# Allegro board BU90007GWZ-E2EVK-101_BRD_REV00_2014-02-12.brd
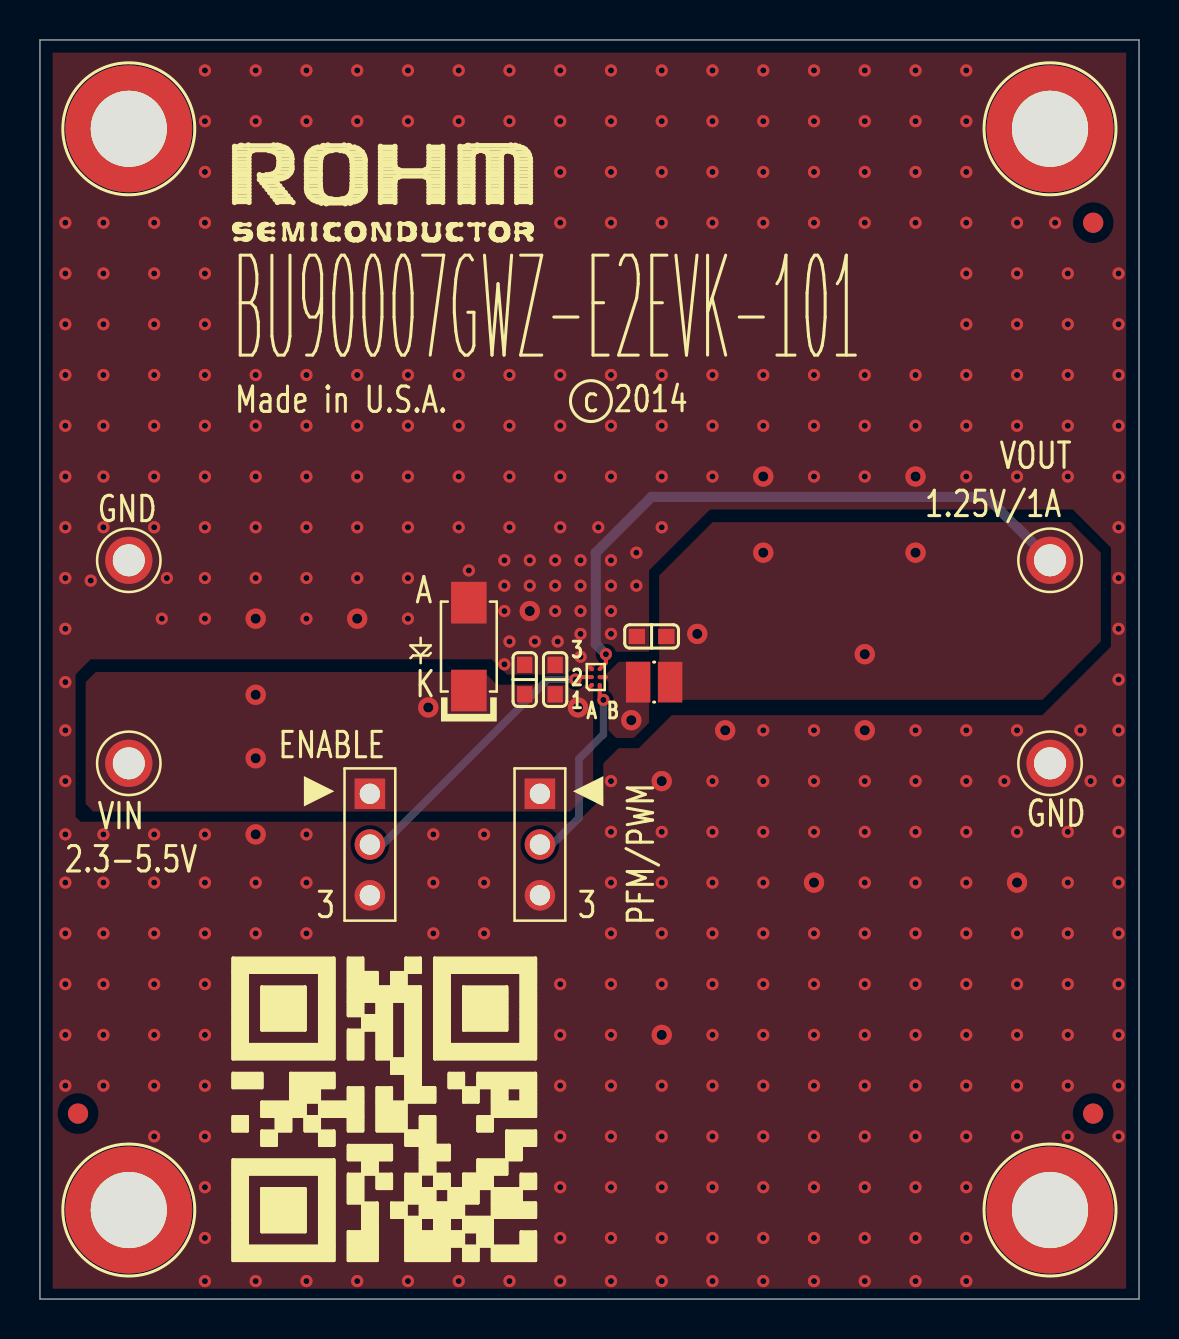
[diagram p0: board, top side]
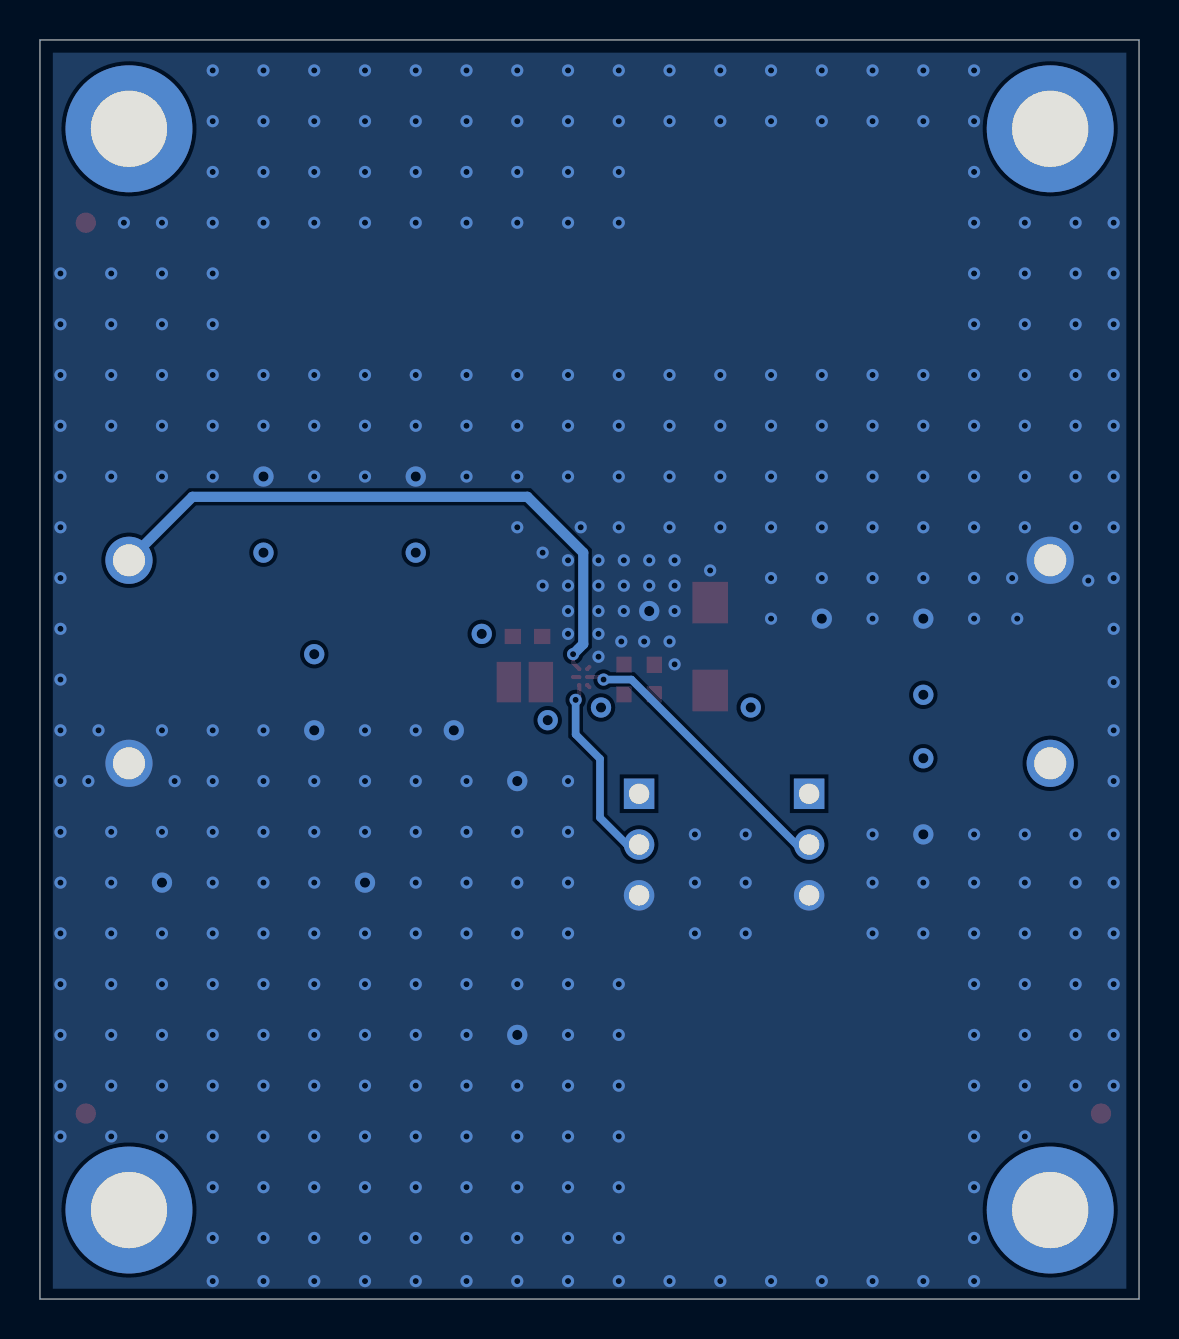
[diagram p1: board, bottom side, seen from below]

Outline 55 x 63 mm; copper layers: TOP, BOTTOM. Coordinates in mm from the lower left corner of the outline.
Outline path: 0,63 55,63 55,0 0,0 0,63

## Placement (name value [footprint] x y rotation side)
C1  4.7uF  [C0603]  24.26 31 270 top
C2  4.7uF  [C0603]  30.61 33.15 0 top
C3  0.1uF  [C0603]  25.78 31 270 top
D1  P4SMA6.8A  [DO-214AC]  21.46 32.65 90 top
J1  87224-3  [HDR_THVT_1X3_100]  16.51 25.28 270 top
J2  87224-3  [HDR_THVT_1X3_100]  25.02 25.28 270 top
L1  1.0uH  [SMT_2P5X2P0_FIT]  30.73 30.87 0 top
NOREF  -  []  0 63 0 top
NOREF#2  -  [unnamed#2]  50.55 58.55 0 top
NOREF#3  -  []  4.45 4.45 0 top
NOREF#4  -  [unnamed#3]  52.7 53.86 0 top
NOREF#5  -  [unnamed#3]  1.91 9.28 0 top
NOREF#6  -  []  55 0 0 top
NOREF#7  -  [unnamed#2]  4.45 4.45 0 top
NOREF#8  -  []  50.55 4.45 0 top
NOREF#9  -  []  0 63 0 top
NOREF#10  -  [unnamed#2]  4.45 58.55 0 top
NOREF#11  -  []  0 0 0 top
NOREF#12  -  []  -63.5 -109.34 0 top
NOREF#13  -  []  4.45 4.45 0 top
NOREF#14  -  []  4.45 58.55 0 top
NOREF#15  -  []  0 0 0 top
NOREF#16  -  []  -18.29 -22.09 0 top
NOREF#17  -  [unnamed#2]  50.55 4.45 0 top
NOREF#18  -  [unnamed#3]  52.7 9.28 0 top
NOREF#19  -  []  55 0 90 top
TP1  TP_TH_63MIL_RED  [TP_TH]  4.45 26.8 0 top
TP2  TP_TH_63MIL_BLK  [TP_TH]  4.45 36.96 0 top
TP3  TP_TH_63MIL_RED  [TP_TH]  50.55 36.96 0 top
TP4  TP_TH_63MIL_BLK  [TP_TH]  50.55 26.8 0 top
U1  BU90007GWZ  [UCSP35L1]  27.81 31.12 90 top

## Library data of the parts
C1-C3 = CAP_VER
D1 = DIODE_ZENER_VER
J1 J2 = CONN_PCB_3x1_2.100INCH
L1 = IND_HOZ
TP1 TP3 = TP_TH_63MIL_RED
TP2 TP4 = TP_TH_63MIL_BLK
U1 = IC_BU9000xGWZ

## Footprints (pads in the part's own frame, mm; a bottom-side part is the same pattern mirrored in y, then rotated)
C0603
  rect 0.813x0.762 smd: 1(0.737,0) 2(-0.737,0)
DO-214AC
  rect 2.083x1.778 smd: 1(-2.2,0) 2(2.2,0)
HDR_THVT_1X3_100
  rect 1.524x1.524 hole 1.016: 1(0,0)
  round 1.524 hole 1.016: 2(2.54,0) 3(5.08,0)
SMT_2P5X2P0_FIT
  rect 1.219x2.032 smd: 1(-0.8,0) 2(0.8,0)
TP_TH
  round 2.362 hole 1.6: 1(0,0)
UCSP35L1
  round 0.203 smd: A1(-0.4,0.2) A2(0,0.2) A3(0.4,0.2) B1(-0.4,-0.2) B2(0,-0.2) B3(0.4,-0.2)
unnamed#2
  round 6.35 hole 3.81: (0,0)
unnamed#3
  round 1.016 smd: 1(0,0)

## Nets
GND: C1.2 C2.2 C3.2 D1.2(A) J1.3 J2.3 TP2.1 TP4.1 U1.A3(GND)
VIN: C1.1 C3.1 D1.1(C) J1.1 J2.1 TP1.1 U1.A1(VIN)
VOUT: C2.1 L1.2 TP3.1 U1.B3(FB)
N10639: J1.2 U1.A2(EN)
N10643: J2.2 U1.B1(MODE)
N10688: L1.1 U1.B2(LX)

Pads without a net: NOREF#4 1; NOREF#5 1; NOREF#18 1

## Via types
v1: diameter 0.61, hole 0.305, TOP to BOTTOM, 365 vias
v2: diameter 1.016, hole 0.508, TOP to BOTTOM, 21 vias

## Routing (per net, layer and track width the routed paths; a pad name or vN(x,y) marks a point on that pad's centre or on a via; arc(x,y) is an arc through that point)
GND: length 0.2
  TOP w0.203: U1.A3 27.51,31.63
  vias: v1(1.27,53.86) v1(1.27,51.32) v1(1.27,48.78) v1(1.27,46.24) v1(1.27,43.7) v1(1.27,41.16) v1(1.27,38.62) v1(1.27,36.08) v1(1.27,33.54) v1(1.27,30.87) v1(1.27,28.46) v1(1.27,25.92) v1(1.27,23.25) v1(1.27,20.84) v1(1.27,18.3) v1(1.27,15.76) v1(1.27,13.22) v1(1.27,10.68) v1(2.54,35.95) v1(3.18,53.86) v1(3.18,51.32) v1(3.18,48.78) v1(3.18,46.24) v1(3.18,43.7) v1(3.18,41.16) v1(3.18,38.62) v1(3.18,23.25) v1(3.18,20.84) v1(3.18,18.3) v1(3.18,15.76) v1(3.18,13.22) v1(3.18,10.68) v1(5.71,53.86) v1(5.71,51.32) v1(5.71,48.78) v1(5.71,46.24) v1(5.71,43.7) v1(5.71,41.16) v1(5.71,38.62) v1(5.71,23.25) v1(5.71,20.84) v1(5.71,18.3) v1(5.71,15.76) v1(5.71,13.22) v1(5.71,10.68) v1(5.71,8.14) v1(6.1,34.04) v1(6.35,36.08) v1(8.26,61.48) v1(8.26,58.94) v1(8.26,56.4) v1(8.26,53.86) v1(8.26,51.32) v1(8.26,48.78) v1(8.26,46.24) v1(8.26,43.7) v1(8.26,41.16) v1(8.26,38.62) v1(8.26,36.08) v1(8.26,34.04) v1(8.26,23.25) v1(8.26,20.84) v1(8.26,18.3) v1(8.26,15.76) v1(8.26,13.22) v1(8.26,10.68) v1(8.26,8.14) v1(8.26,5.6) v1(8.26,3.06) v1(8.26,0.9) v1(10.79,61.48) v1(10.79,58.94) v1(10.79,46.24) v1(10.79,43.7) v1(10.79,41.16) v1(10.79,38.62) v1(10.79,36.08) v1(10.79,20.84) v1(10.79,18.3) v1(10.79,0.9) v1(13.34,61.48) v1(13.34,58.94) v1(13.34,46.24) v1(13.34,43.7) v1(13.34,41.16) v1(13.34,38.62) v1(13.34,36.08) v1(13.34,34.04) v1(13.34,23.25) v1(13.34,20.84) v1(13.34,18.3) v1(13.34,0.9) v1(15.88,61.48) v1(15.88,58.94) v1(15.88,46.24) v1(15.88,43.7) v1(15.88,41.16) v1(15.88,38.62) v1(15.88,36.08) v1(15.88,0.9) v1(18.41,61.48) v1(18.41,58.94) v1(18.41,46.24) v1(18.41,43.7) v1(18.41,41.16) v1(18.41,38.62) v1(18.41,36.08) v1(18.41,34.04) v1(18.41,0.9) v1(19.69,23.25) v1(19.69,20.84) v1(19.69,18.3) v1(20.96,61.48) v1(20.96,58.94) v1(20.96,46.24) v1(20.96,43.7) v1(20.96,41.16) v1(20.96,38.62) v1(20.96,0.9) v1(21.46,36.46) v1(22.23,23.25) v1(22.23,20.84) v1(22.23,18.3) v1(23.24,36.96) v1(23.24,35.69) v1(23.24,34.42) v1(23.24,31.76) v1(23.5,61.48) v1(23.5,58.94) v1(23.5,46.24) v1(23.5,43.7) v1(23.5,41.16) v1(23.5,38.62) v1(23.5,32.9) v1(23.5,0.9) v1(24.51,36.96) v1(24.51,35.69) v1(24.77,32.9) v1(25.78,36.96) v1(25.78,35.69) v1(25.78,34.42) v1(25.91,32.9) v1(26.04,61.48) v1(26.04,58.94) v1(26.04,56.4) v1(26.04,53.86) v1(26.04,46.24) v1(26.04,43.7) v1(26.04,41.16) v1(26.04,38.62) v1(26.04,15.76) v1(26.04,13.22) v1(26.04,10.68) v1(26.04,8.14) v1(26.04,5.6) v1(26.04,3.06) v1(26.04,0.9) v1(27.05,36.96) v1(27.05,35.69) v1(27.05,34.42) v1(27.05,33.28) v1(27.05,32.14) v1(27.94,38.62) v1(28.57,61.48) v1(28.57,58.94) v1(28.57,56.4) v1(28.57,53.86) v1(28.57,46.24) v1(28.57,43.7) v1(28.57,41.16) v1(28.57,36.96) v1(28.57,35.69) v1(28.57,34.42) v1(28.57,33.28) v1(28.57,25.92) v1(28.57,23.38) v1(28.57,20.84) v1(28.57,18.3) v1(28.57,15.76) v1(28.57,13.22) v1(28.57,10.68) v1(28.57,8.14) v1(28.57,5.6) v1(28.57,3.06) v1(28.57,0.9) v1(29.84,37.35) v1(29.84,35.69) v1(31.12,61.48) v1(31.12,58.94) v1(31.12,56.4) v1(31.12,53.86) v1(31.12,46.24) v1(31.12,43.7) v1(31.12,41.16) v1(31.12,38.62) v1(31.12,23.38) v1(31.12,20.84) v1(31.12,18.3) v1(31.12,15.76) v1(31.12,10.68) v1(31.12,8.14) v1(31.12,5.6) v1(31.12,3.06) v1(31.12,0.9) v1(33.66,61.48) v1(33.66,58.94) v1(33.66,56.4) v1(33.66,53.86) v1(33.66,46.24) v1(33.66,43.7) v1(33.66,41.16) v1(33.66,25.92) v1(33.66,23.38) v1(33.66,20.84) v1(33.66,18.3) v1(33.66,15.76) v1(33.66,13.22) v1(33.66,10.68) v1(33.66,8.14) v1(33.66,5.6) v1(33.66,3.06) v1(33.66,0.9) v1(36.2,61.48) v1(36.2,58.94) v1(36.2,56.4) v1(36.2,53.86) v1(36.2,46.24) v1(36.2,43.7) v1(36.2,28.46) v1(36.2,25.92) v1(36.2,23.38) v1(36.2,20.84) v1(36.2,18.3) v1(36.2,15.76) v1(36.2,13.22) v1(36.2,10.68) v1(36.2,8.14) v1(36.2,5.6) v1(36.2,3.06) v1(36.2,0.9) v1(38.73,61.48) v1(38.73,58.94) v1(38.73,56.4) v1(38.73,53.86) v1(38.73,46.24) v1(38.73,43.7) v1(38.73,41.16) v1(38.73,28.46) v1(38.73,25.92) v1(38.73,23.38) v1(38.73,18.3) v1(38.73,15.76) v1(38.73,13.22) v1(38.73,10.68) v1(38.73,8.14) v1(38.73,5.6) v1(38.73,3.06) v1(38.73,0.9) v1(41.27,61.48) v1(41.27,58.94) v1(41.27,56.4) v1(41.27,53.86) v1(41.27,46.24) v1(41.27,43.7) v1(41.27,41.16) v1(41.27,25.92) v1(41.27,23.38) v1(41.27,20.84) v1(41.27,18.3) v1(41.27,15.76) v1(41.27,13.22) v1(41.27,10.68) v1(41.27,8.14) v1(41.27,5.6) v1(41.27,3.06) v1(41.27,0.9) v1(43.81,61.48) v1(43.81,58.94) v1(43.81,56.4) v1(43.81,53.86) v1(43.81,46.24) v1(43.81,43.7) v1(43.81,28.46) v1(43.81,25.92) v1(43.81,23.38) v1(43.81,20.84) v1(43.81,18.3) v1(43.81,15.76) v1(43.81,13.22) v1(43.81,10.68) v1(43.81,8.14) v1(43.81,5.6) v1(43.81,3.06) v1(43.81,0.9) v1(46.35,61.48) v1(46.35,58.94) v1(46.35,56.4) v1(46.35,53.86) v1(46.35,51.32) v1(46.35,48.78) v1(46.35,46.24) v1(46.35,43.7) v1(46.35,41.16) v1(46.35,28.46) v1(46.35,25.92) v1(46.35,23.38) v1(46.35,20.84) v1(46.35,18.3) v1(46.35,15.76) v1(46.35,13.22) v1(46.35,10.68) v1(46.35,8.14) v1(46.35,5.6) v1(46.35,3.06) v1(46.35,0.9) v1(48.26,25.92) v1(48.9,53.86) v1(48.9,51.32) v1(48.9,48.78) v1(48.9,46.24) v1(48.9,43.7) v1(48.9,41.16) v1(48.9,28.46) v1(48.9,23.38) v1(48.9,18.3) v1(48.9,15.76) v1(48.9,13.22) v1(48.9,10.68) v1(48.9,8.14) v1(50.8,53.86) v1(51.44,51.32) v1(51.44,48.78) v1(51.44,46.24) v1(51.44,43.7) v1(51.44,41.16) v1(51.44,23.38) v1(51.44,20.84) v1(51.44,18.3) v1(51.44,15.76) v1(51.44,13.22) v1(51.44,10.68) v1(51.44,8.14) v1(52.07,28.46) v1(52.58,25.92) v1(53.98,51.32) v1(53.98,48.78) v1(53.98,46.24) v1(53.98,43.7) v1(53.98,41.16) v1(53.98,38.62) v1(53.98,36.08) v1(53.98,33.54) v1(53.98,31) v1(53.98,28.46) v1(53.98,25.92) v1(53.98,23.38) v1(53.98,20.84) v1(53.98,18.3) v1(53.98,15.76) v1(53.98,13.22) v1(53.98,10.68) v1(53.98,8.14) v2(10.79,34.04) v2(10.79,23.25) v2(15.88,34.04) v2(24.51,34.42) v2(31.12,25.92) v2(31.12,13.22) v2(34.29,28.46) v2(36.2,41.16) v2(38.73,20.84) v2(41.27,28.46) v2(43.81,41.16) v2(48.9,20.84)
VIN: length 0.2
  TOP w0.203: 27.51,30.61 U1.A1
  vias: v2(10.79,30.23) v2(10.79,27.06) v2(19.43,29.6) v2(26.92,29.6)
VOUT: length 31.4
  TOP w0.203: U1.B3 28.32,31.83 v1(28.32,32.27)
  BOTTOM w0.508: v1(28.32,32.27) 27.81,32.77 27.81,37.35 30.61,40.14 47.37,40.14 TP3.1
  vias: v2(32.89,33.28) v2(36.2,37.35) v2(41.27,32.27) v2(43.81,37.35)
N10639: length 14.6
  TOP w0.203: v1(26.8,31) 26.92,31.12 U1.A2
  BOTTOM w0.381: v1(26.8,31) 25.4,31 17.14,22.74 J1.2
N10643: length 9.7
  TOP w0.203: v1(28.19,29.98) 28.01,30.16 U1.B1
  BOTTOM w0.381: v1(28.19,29.98) 28.19,28.25 26.97,27.03 26.97,24.09 25.63,22.74 J2.2
N10688: length 0.3
  TOP w0.203: U1.B2 28.32,31.12
  vias: v2(29.59,28.96)

## Copper pours and planes (outline as drawn; the poured copper is in the pictures)
GND on TOP: 0.64,62.36 0.64,0.52 54.36,0.52 54.36,62.36 ; 1 cut-out
GND on BOTTOM: 0.64,62.36 0.64,0.52 54.36,0.52 54.36,62.36
VIN on TOP: 27.69,30.74 27.69,25.53 26.54,24.39 2.67,24.39 2.29,24.77 2.29,30.87 2.79,31.38 22.23,31.38 22.86,30.74
VOUT on TOP: 30.99,29.98 50.16,29.98 53.09,32.9 53.09,37.35 51.56,38.87 33.66,38.87 30.99,36.2
N10688 on TOP: 27.91,31 28.32,31 28.45,30.87 28.45,28.46 28.83,28.07 29.72,28.07 30.48,28.84 30.48,31.88 28.96,31.88 28.3,31.22 27.91,31.22

## Text on the board
Ref Des/Silkscreen Top: 2.3-5.5V | GND | VIN | Made in U.S.A. | ENABLE | c 2014 | 1.25V/1A | VOUT | PFM/PWM | BU90007GWZ-E2EVK-101
User.17: 14. Rounding is allowed on 90 degree corners with the size of | 12. Inside corners should be rounded-off | 13. Changes to board geometries and apertures are not | 10. Bow and Twist | 11. Inspection | standard routing bit. | allowed unless they are approved by customer. | 4. Drilling | 5. Finish | 9. Packaging | 8. Cleanliness | 7. Electrical Test | 3. Soldermask | photoimageable soldermask, 003 max. thickness. | Soldermask over bare copper. | Soldermask is allowed in via holes. | Bow and twist to be .007 IN/IN or .090 max according to IPC-A-600D. | NOTES: | 2. Material | 6. Silkscreen | to conduct a thorough review of the artwork and media for | writing (in advance of manufacturing) of any changes, revisions,or | 1. Specifications. | as meaxured by the omega meter 600SMD. | A. All hole diameters are finished sizes. | B. All hole to be +/- .003 from true position unless otherwise specified. | C. All hole diameters to be +/- .003 unless otherwise specified. | D. An NC drill file has been supplied - see drill table. | A. Plate thru with copper .0010 min to .002 max. thickness drill size | dimension apply after plating. | B. Use gold immersion over nickel. | C. Finished boards shall not have nicks, | scratches, voids, exposed copper, poor plating, all misdrilled holes. | manufacturability in the supplier's process compliance to all | A. Boards shall be free of fiber glass dust or any other foreign material. | B. Finished boards must conform to 0.01 MG/IN max NAcL ionic contamination | A. All boards shall be 100% electrically tested for opens/short at 10 volts. | MIL-SPEC boards to be tested at 40 volts. | B. Apply test stamp in non-legend area on solder side of PCB. | C. Test is required on both sides of the board. | Solder mask both sides with (green color) liquid | A. FR406. | B. Color to be opaque. | A. Silkscreen using white non-conductive epoxy or equivalent (both sides). | B. No silkscreen allowed on exposed lands. | C. Silkscreen must be a minimum of 3mm away form fiducial marks. | D. Minimum clearance between silkscreen legend and vias, pads, or holes | to be .005. | E. Silkscreen is allowed in via holes. | There shall be a max of 25 units per package, individually wrapped, | and shipped in cardboard cratons with sufficient surrounding | material to prevend shipping damage. | A.Automatic optical inspection of all layers required. | B.The impedance should be controlled by stackup layer. | gerber and drill data when applicable. | A. Fabricate IAW  IPC600, latest revision. | B. Producibility study - It is the respondsibility  of the supplier | corrections made or recommendations to ensure conformance to | D. This drawing is to be used in conjunction with the provided | E. All notes are "Unless Otherwise Specified." | standards, and of  any specifications that  cannot be met. | applicable specifications. Customer must be advised in
User.27: L2_GND
User.28: L3_PWR
User.29: 1 | 2 | L | TOTAL 62 MILs +/-10% thickness board | a | - | y | e | r | s | T | ( | . | m | h | C | 7 | i | 0 | c | u | l | k | ) | D | P | w | 2 oz | t | H | F | o | z | p | V
User.32: FIGURE | SIZE | 12.0 | 20.0 | 40.0 | 63.0 | 150.0 | DRILL CHART: TOP to BOTTOM | ALL UNITS ARE IN MILS | TOLERANCE | +3.0/-10.0 | +3.0/-3.0 | PLATED | QTY | 365 | 21 | 6 | 4
